# EAGLE board HW3 (EAGLE 9.3.2)
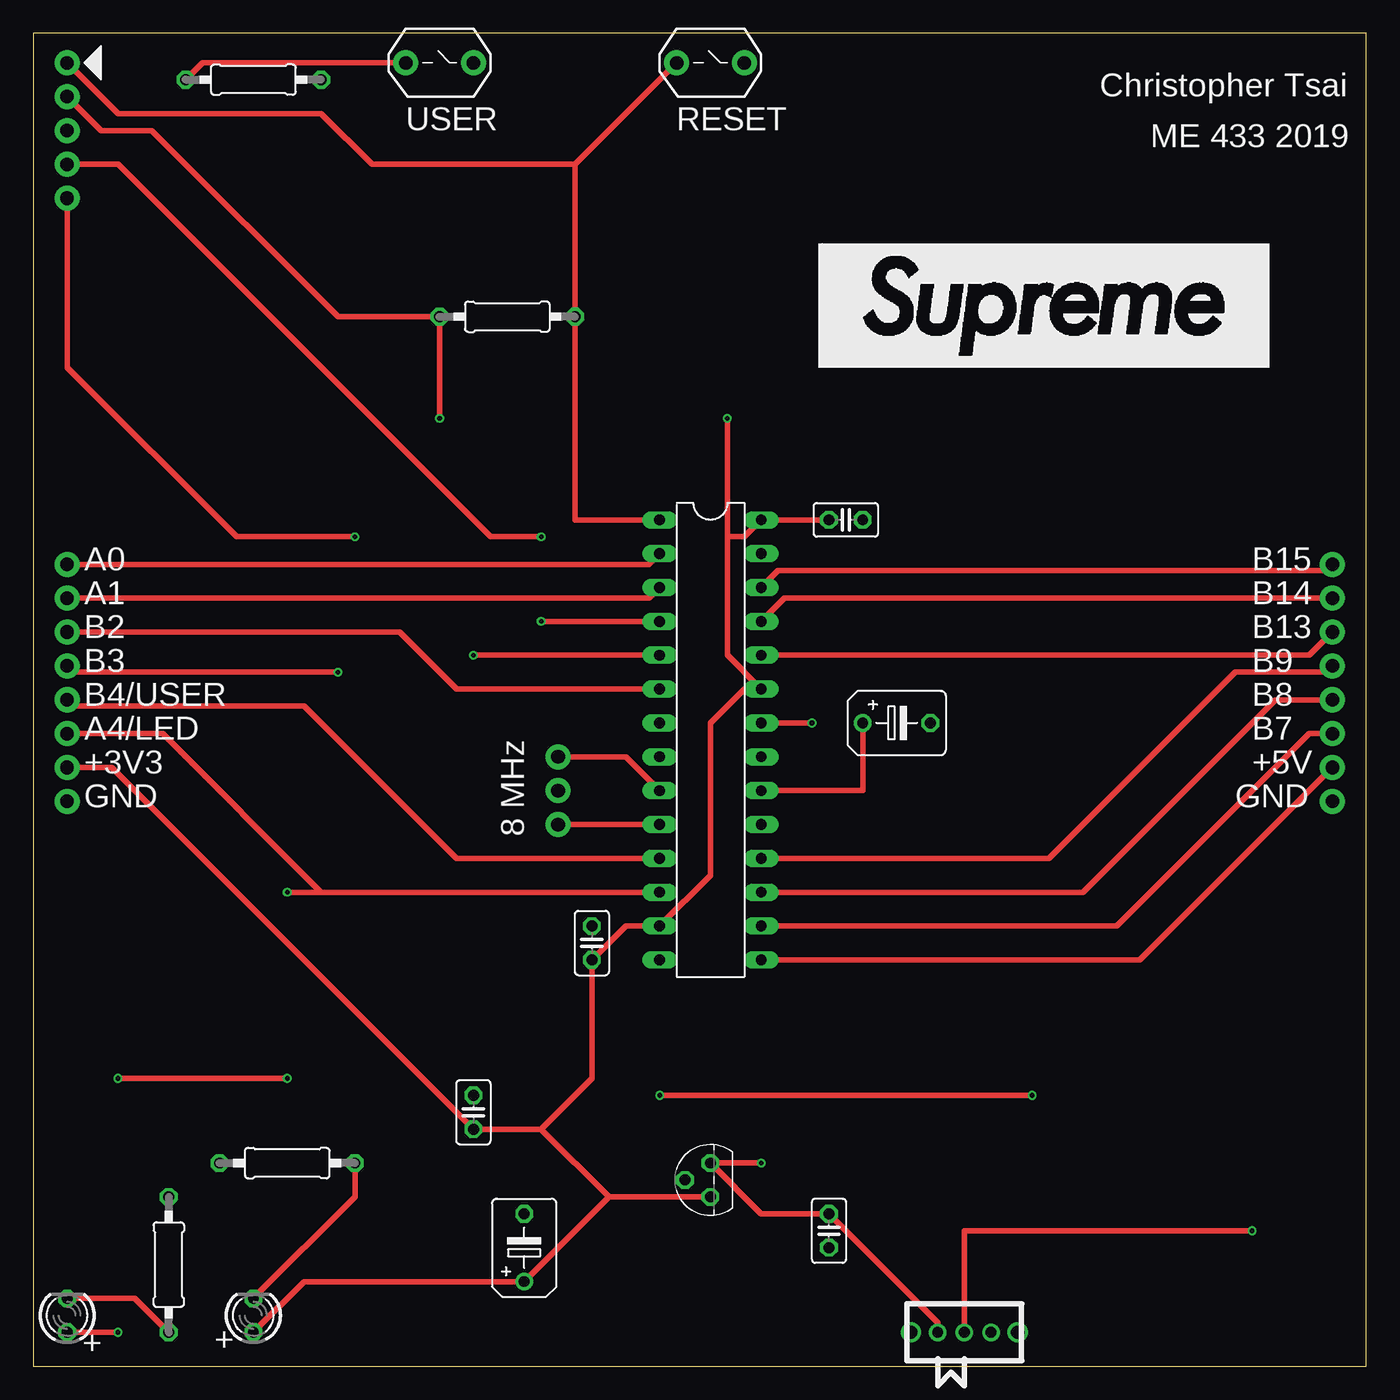
[diagram p0: board, top side]
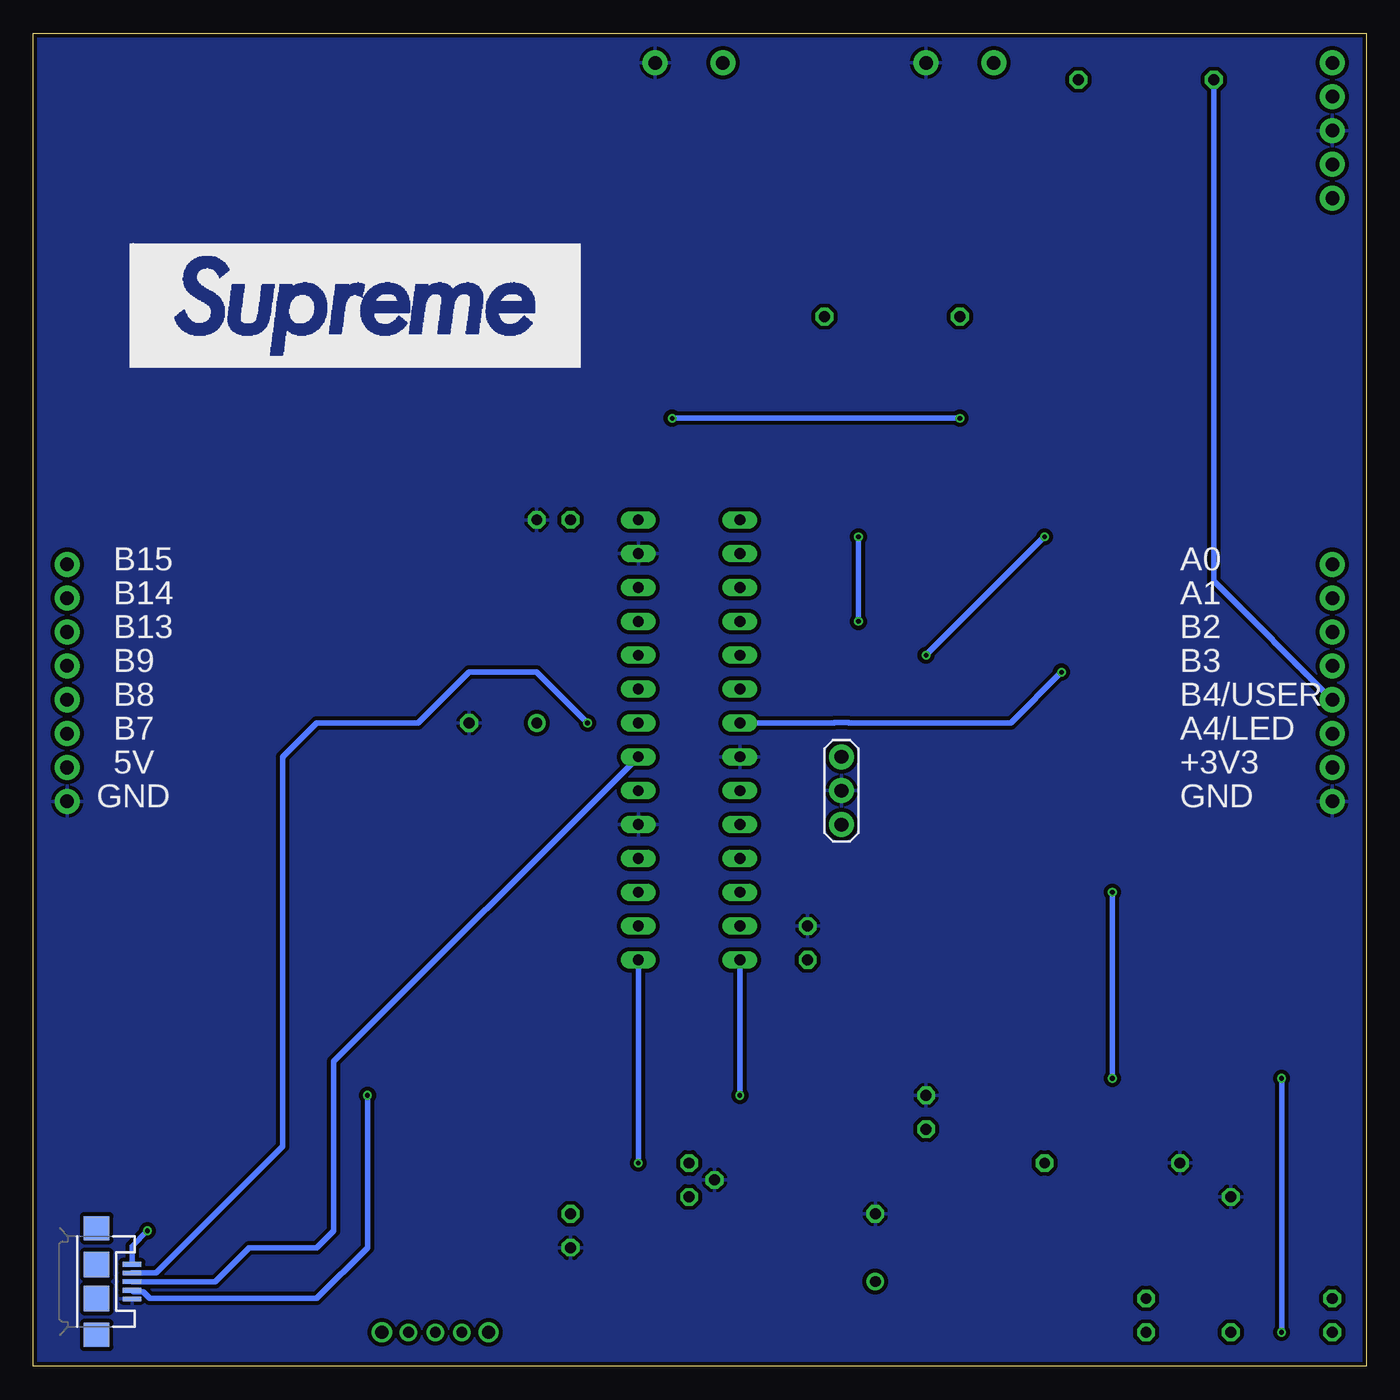
[diagram p1: board, bottom side, seen from below]

Size 100 x 100 mm. Coordinates in mm from the lower left corner, seen from the top.
Outline: 0,0 100,0 100,100 0,100 0,0
Copper layers (1*16): Top 0.035mm / dielectric 1.5mm / Bottom 0.035mm
Design rules "SeeedStudio_2layer_DRU_no_angle_20140221": minimum track width 6mil, minimum drill 12mil, track to track 6mil, track to pad 6mil, pad to pad 6mil, via to via 6mil, smd to smd 0mil, copper to edge 10mil, drill to drill 10mil, minimum pad ring 10mil, minimum via ring 6mil, stop-mask expansion 2mil, vias tented up to drill 100mil, thermal gap 10mil

## Footprints (pad centres in the part's own frame; a part is rotated, then mirrored left to right if it is on the bottom)
C025-025X050 = drill 0.813 octagon: 1 -1.27,0; 2 1.27,0
B45181B = drill 0.813: + -2.54,0 | drill 0.813 octagon: - 2.54,0
USB-MICROB = smd 1.4 x 0.35: D+ -2.65,0; D- -2.65,-0.65; GND -2.65,1.3; ID -2.65,0.65; VBUS -2.65,-1.3 | smd 1.9 x 1.8: MT1 0,-4; MT2 0,4 | smd 1.9 x 1.9: P$1 0,-1.27; P$2 0,1.27
LED3MM = drill 0.813 octagon: A -1.27,0; K 1.27,0
0207/10 = drill 0.813 octagon: 1 -5.08,0; 2 5.08,0
DIL28-3 = drill 0.813 long: 1 -16.51,-3.81; 2 -13.97,-3.81; 3 -11.43,-3.81; 4 -8.89,-3.81; 5 -6.35,-3.81; 6 -3.81,-3.81; 7 -1.27,-3.81; 8 1.27,-3.81; 9 3.81,-3.81; 10 6.35,-3.81; 11 8.89,-3.81; 12 11.43,-3.81; 13 13.97,-3.81; 14 16.51,-3.81; 15 16.51,3.81; 16 13.97,3.81; 17 11.43,3.81; 18 8.89,3.81; 19 6.35,3.81; 20 3.81,3.81; 21 1.27,3.81; 22 -1.27,3.81; 23 -3.81,3.81; 24 -6.35,3.81; 25 -8.89,3.81; 26 -11.43,3.81; 27 -13.97,3.81; 28 -16.51,3.81
SLIDE_SWITCH = drill 0.8: 1 -2,0; 2 0,0; 3 2,0 | drill 1: P$1 -4,0; P$2 4,0
TO92 = drill 0.813 octagon: 1 -1.27,0; 2 0,1.905; 3 1.27,0
PUSH_BUTTON = drill 1.016 pad 1.88: 1 -2.54,0; 2 2.54,0
1X08 = drill 1.016 pad 1.88: 1 0,0; 2 2.54,0; 3 5.08,0; 4 7.62,0; 5 10.16,0; 6 12.7,0; 7 15.24,0; 8 17.78,0
1X05 = drill 1.016 pad 1.88: 1 0,0; 2 2.54,0; 3 5.08,0; 4 7.62,0; 5 10.16,0
OSCILLATOR = drill 1.016 pad 1.88: 1 -2.54,0; 2 0,0; 3 2.54,0

## Placement (x,y rotation side)
C1  0.1 μF  [C025-025X050]  60.96,63.5 0 top
C2  0.1 μF  [C025-025X050]  41.91,31.75 90 top
C3  0.1 μF  [C025-025X050]  59.69,10.16 270 top
C4  0.1 μF  [C025-025X050]  33.02,19.05 90 top
C5  10 μF  [B45181B]  64.77,48.26 0 top
C6  10 μF  [B45181B]  36.83,8.89 90 top
J1  [USB-MICROB]  95.25,6.35 180 bottom
LED1  Red  [LED3MM]  16.51,3.81 90 top
LED2  Green  [LED3MM]  2.54,3.81 90 top
R1  330 Ω  [0207/10]  19.05,15.24 0 top
R2  330 Ω  [0207/10]  10.16,7.62 270 top
R3  10 kΩ  [0207/10]  35.56,78.74 180 top
R4  10 kΩ  [0207/10]  16.51,96.52 0 top
U$1  PIC32MX250F128B  [DIL28-3]  50.8,46.99 270 top
U$2  SLIDE_SWITCH  [SLIDE_SWITCH]  69.85,2.54 180 top
U$3  VOLTAGE_REGULATOR_L4931  [TO92]  50.8,13.97 90 top
U$4  RESET  [PUSH_BUTTON]  50.8,97.79 0 top
U$5  USER  [PUSH_BUTTON]  30.48,97.79 0 top
U$6  CONN_08  [1X08]  97.46,42.38 90 top
U$7  CONN_08  [1X08]  2.54,42.38 90 top
U$8  SNAP  [1X05]  2.54,97.79 270 top
U$9  8 MHz  [OSCILLATOR]  39.37,43.18 270 bottom

## Library data of the parts
C1-C6 = HW2; SPICEPREFIX: C
J1 = HW2; PROD_ID: CONN-09505; SF_ID: PRT-08533
LED1 LED2 U$1-U$9 = HW2
R1-R4 = HW2; SPICEPREFIX: R

## Nets
+3V3: C1.1 C2.1 C4.1 C6.+ LED1.A R3.2 U$1.13 U$1.23 U$1.28 U$3.1 U$7.2 U$8.2
+5V: C3.1 U$1.15 U$2.3 U$3.3 U$6.2
A0: U$1.2 U$7.8
A1: U$1.3 U$7.7
A4/LED: LED2.A U$1.12 U$7.3
B2: U$1.6 U$7.6
B3: U$1.7 U$7.5
B4/USER: R4.1 U$1.11 U$5.1 U$7.4
B7: U$1.16 U$6.3
B8: U$1.17 U$6.4
B9: U$1.18 U$6.5
B13: U$1.24 U$6.6
B14: U$1.25 U$6.7
B15: U$1.26 U$6.8
D+: J1.D+ U$1.21
D-: J1.D- U$1.22
GND: C1.2 C2.2 C3.2 C4.2 C5.- C6.- J1.GND R1.1 R2.1 U$1.8 U$1.19 U$1.27 U$3.2 U$4.2 U$5.2 U$6.1 U$7.1 U$8.3 U$9.2
MCLR: R3.1 U$1.1 U$4.1 U$8.1
N$1: J1.VBUS U$2.2
N$2: LED1.K R1.2
N$3: LED2.K R2.2
N$4: U$1.9 U$9.1
N$5: U$1.10 U$9.3
N$6: C5.+ U$1.20
PGC: U$1.5 U$8.5
PGD: U$1.4 U$8.4
USBID: J1.ID U$1.14

## Tracks (layer width: path | path; a pad name or v marks a point on that pad's centre or on a via)
+3V3  (via drill 0.35)
  Top 0.406: U$3.1 43.18,12.7 | 43.18,12.7 C6.+ 20.32,6.35 LED1.A | 43.18,12.7 38.1,17.78 | 38.1,17.78 C4.1 5.88,44.92 U$7.2 | 38.1,17.78 41.91,21.59 C2.1 44.45,33.02 U$1.13 50.8,36.83 50.8,48.26 53.34,50.8 U$1.23 52.07,53.34 52.07,62.23 | 52.07,62.23 53.34,62.23 U$1.28 C1.1 | U$8.2 5.08,92.71 8.89,92.71 22.86,78.74 R3.2 v30.48,71.12 | 52.07,62.23 v52.07,71.12
  Bottom 0.406: v52.07,71.12 v30.48,71.12
+5V  (via drill 0.35)
  Top 0.152: U$2.3 67.85,3.27
  Top 0.406: 67.85,3.27 C3.1 54.61,11.43 U$3.3 v54.61,15.24 | U$1.15 83.02,30.48 U$6.2
  Bottom 0.406: U$1.15 v54.61,15.24
A0
  Top 0.406: U$7.8 46.19,60.16 U$1.2
A1
  Top 0.406: U$7.7 46.19,57.62 U$1.3
A4/LED  (via drill 0.35)
  Top 0.406: U$1.12 21.59,35.56 | U$7.3 9.69,47.46 21.59,35.56 | 21.59,35.56 v19.05,35.56 | v19.05,21.59 v6.35,21.59 | v6.35,2.54 LED2.A
  Bottom 0.406: v19.05,35.56 v19.05,21.59 | v6.35,21.59 v6.35,2.54
B2
  Top 0.406: U$1.6 31.75,50.8 27.47,55.08 U$7.6
B3  (via drill 0.35)
  Top 0.406: v22.86,52.07 3.01,52.07 U$7.5
  Bottom 0.406: v22.86,52.07 26.67,48.26 38.81,48.26 38.83,48.28 39.91,48.28 39.93,48.26 U$1.7
B4/USER
  Top 0.406: U$5.1 12.7,97.79 R4.1 | U$1.11 31.75,38.1 20.32,49.53 3.01,49.53 U$7.4
  Bottom 0.406: R4.1 11.43,58.89 U$7.4
B7
  Top 0.406: U$1.16 81.28,33.02 95.72,47.46 U$6.3
B8
  Top 0.406: U$1.17 78.74,35.56 93.18,50 U$6.4
B9
  Top 0.406: U$1.18 76.2,38.1 90.17,52.07 96.99,52.07 U$6.5
B13
  Top 0.406: U$1.24 95.72,53.34 U$6.6
B14
  Top 0.406: U$1.25 56.35,57.62 U$6.7
B15
  Top 0.406: U$1.26 55.88,59.69 97.79,59.69 97.46,60.02 U$6.8
D+
  Bottom 0.406: U$1.21 77.47,22.86 77.47,10.16 78.74,8.89 83.82,8.89 86.36,6.35 J1.D+
D-  (via drill 0.35)
  Top 0.406: U$1.22 v58.42,48.26
  Bottom 0.406: J1.D- 90.79,7 81.28,16.51 81.28,45.72 78.74,48.26 71.12,48.26 67.31,52.07 62.23,52.07 v58.42,48.26
GND
  pour Bottom (isolate 0.305): 0,100.33 0,-1.27 100.33,-1.27 101.6,0 101.6,101.6 1.27,101.6
MCLR
  Top 0.406: 40.64,90.17 R3.1 40.64,63.5 U$1.1 | 40.64,90.17 U$4.1 | U$8.1 6.35,93.98 21.59,93.98 25.4,90.17 40.64,90.17
N$1  (via drill 0.35)
  Top 0.406: v91.44,10.16 69.85,10.16 U$2.2
  Bottom 0.406: J1.VBUS 92.6,9 v91.44,10.16
N$2
  Top 0.406: LED1.K 24.13,12.7 R1.2
N$3
  Top 0.406: R2.2 7.62,5.08 LED2.K
N$4
  Top 0.406: U$9.1 44.45,45.72 U$1.9
N$5
  Top 0.406: U$9.3 U$1.10
N$6
  Top 0.406: U$1.20 62.23,43.18 C5.+
PGC  (via drill 0.35)
  Top 0.406: U$1.5 v33.02,53.34 | v24.13,62.23 15.24,62.23 2.54,74.93 U$8.5
  Bottom 0.406: v33.02,53.34 v24.13,62.23
PGD  (via drill 0.35)
  Top 0.406: U$1.4 v38.1,55.88 | v38.1,62.23 34.29,62.23 6.35,90.17 U$8.4
  Bottom 0.406: v38.1,55.88 v38.1,62.23
USBID  (via drill 0.35)
  Top 0.406: v46.99,20.32 v74.93,20.32
  Bottom 0.406: U$1.14 v46.99,20.32 | J1.ID 92.48,5.58 91.75,5.58 91.25,5.08 78.74,5.08 74.93,8.89 v74.93,20.32

## Text on the board
tPlace: Christopher Tsai | USER | RESET | ME 433 2019 | A0 | B15 | A1 | B14 | B2 | B13 | B3 | B9 | B4/USER | B8 | A4/LED | B7 | +3V3 | +5V | GND | GND | 8 MHz | + | +
bPlace: A0 | B15 | A1 | B14 | B2 | B13 | B3 | B9 | B4/USER | B8 | A4/LED | B7 | +3V3 | 5V | GND | GND
200bmp: C:/Users/ctsai/Downloads/s-l1000.bmp